# EAGLE board arm (EAGLE 6.5.0)
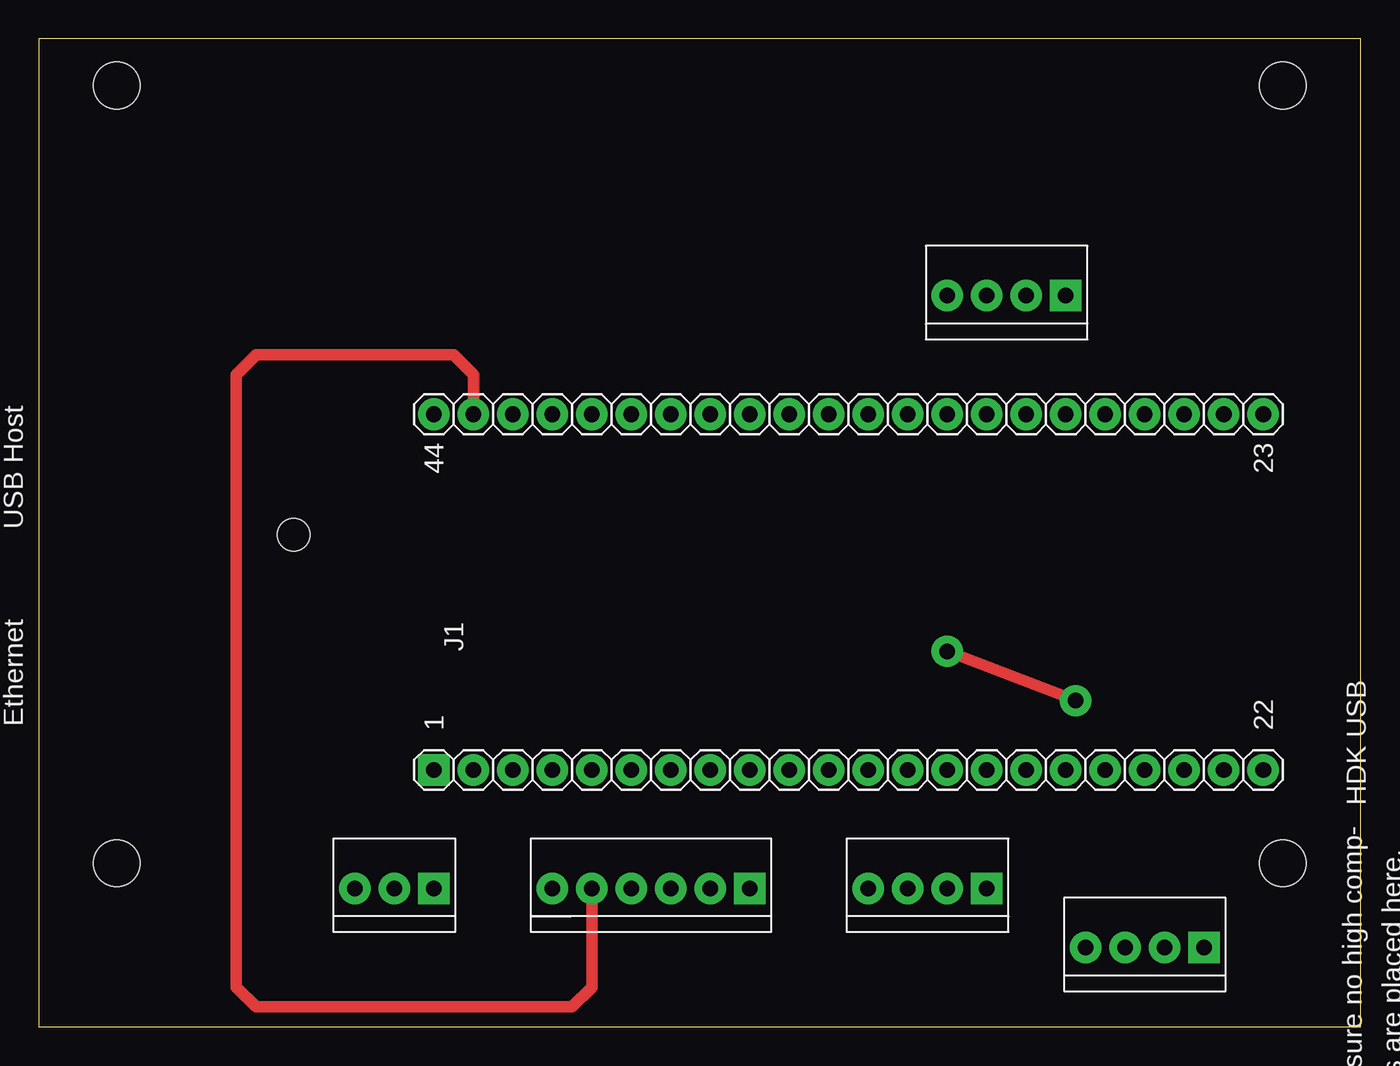
[diagram p0: board, top side]
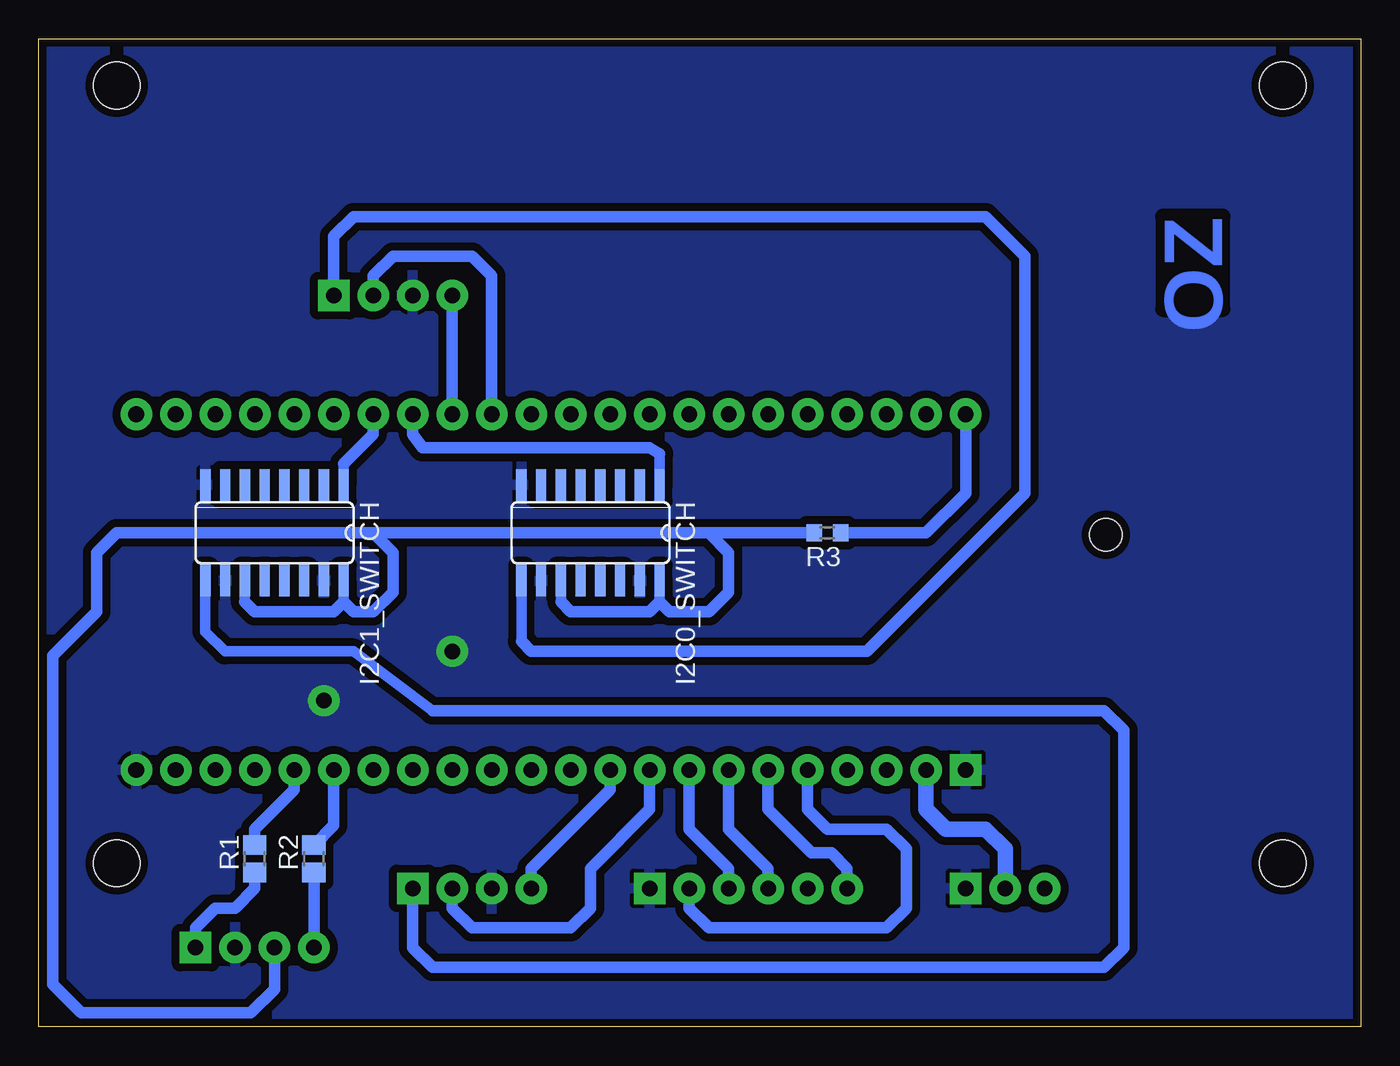
[diagram p1: board, bottom side, seen from below]

Size 85 x 63.5 mm. Coordinates in mm from the lower left corner, seen from the top.
Outline: 0,0 85,0 85,63.5 0,63.5 0,0
Copper layers (1*16): Top 0.035mm / dielectric 1.5mm / Bottom 0.035mm
Design rules "big": minimum track width 25mil, minimum drill 24mil, track to track 20mil, track to pad 20mil, pad to pad 20mil, via to via 20mil, smd to smd 8mil, copper to edge 1mil, drill to drill 40mil, minimum pad ring 10mil, minimum via ring 20mil, stop-mask expansion 4mil, vias tented up to drill 0mil, thermal gap 10mil
Holes 3 mm at 80,10.5 5,10.5 5,60.5 80,60.5

## Footprints (pad centres in the part's own frame; a part is rotated, then mirrored left to right if it is on the bottom)
A2542WV-04P = drill 1 pad 2.027 square: 1 -3.81,0 | drill 1 pad 2.027: 2 -1.27,0; 3 1.27,0; 4 3.81,0
SO16 = smd 0.66 x 2.032: 1 -4.445,-3.073; 2 -3.175,-3.073; 3 -1.905,-3.073; 4 -0.635,-3.073; 5 0.635,-3.073; 6 1.905,-3.073; 7 3.175,-3.073; 8 4.445,-3.073; 9 4.445,3.073; 10 3.175,3.073; 11 1.905,3.073; 12 0.635,3.073; 13 -0.635,3.073; 14 -1.905,3.073; 15 -3.175,3.073; 16 -4.445,3.073
LPC4088_QUICKSTART_BOARD_REV-A = drill 1 pad 2.027 square: 1 -11.43,24.13 | drill 1 pad 2.027: 2 -11.43,21.59; 3 -11.43,19.05; 4 -11.43,16.51; 5 -11.43,13.97; 6 -11.43,11.43; 7 -11.43,8.89; 8 -11.43,6.35; 9 -11.43,3.81; 10 -11.43,1.27; 11 -11.43,-1.27; 12 -11.43,-3.81; 13 -11.43,-6.35; 14 -11.43,-8.89; 15 -11.43,-11.43; 16 -11.43,-13.97; 17 -11.43,-16.51; 18 -11.43,-19.05; 19 -11.43,-21.59; 20 -11.43,-24.13; 21 -11.43,-26.67; 22 -11.43,-29.21; 23 11.43,-29.21; 24 11.43,-26.67; 25 11.43,-24.13; 26 11.43,-21.59; 27 11.43,-19.05; 28 11.43,-16.51; 29 11.43,-13.97; 30 11.43,-11.43; 31 11.43,-8.89; 32 11.43,-6.35; 33 11.43,-3.81; 34 11.43,-1.27; 35 11.43,1.27; 36 11.43,3.81; 37 11.43,6.35; 38 11.43,8.89; 39 11.43,11.43; 40 11.43,13.97; 41 11.43,16.51; 42 11.43,19.05; 43 11.43,21.59; 44 11.43,24.13 | hole 2.1: 3.683,33.147
A2542WV-03P = drill 1 pad 2.027 square: 1 -2.54,0 | drill 1 pad 2.027: 2 0,0; 3 2.54,0
R0805 = smd 1.24 x 1.5: 1 -0.88,0; 2 0.88,0
R0603 = smd 1 x 1.1: 1 -0.85,0; 2 0.85,0
A2542WV-06P = drill 1 pad 2.027 square: 1 -6.35,0 | drill 1 pad 2.027: 2 -3.81,0; 3 -1.27,0; 4 1.27,0; 5 3.81,0; 6 6.35,0

## Placement (x,y rotation side)
I2C0  A2542WV-04P  [A2542WV-04P]  62.23,46.99 180 top
I2C0_SWITCH  MAX4674ESE+  [SO16]  49.53,31.75 180 bottom
I2C1  A2542WV-04P  [A2542WV-04P]  57.15,8.89 180 top
I2C1_SWITCH  MAX4674ESE+  [SO16]  69.85,31.75 180 bottom
J1  LPC4088_QUICKSTART_BOARD_REV-A  [LPC4088_QUICKSTART_BOARD_REV-A]  49.53,27.94 90 top
POWER  A2542WV-03P  [A2542WV-03P]  22.86,8.89 180 top
R1  1k  [R0805]  71.12,10.79 90 bottom
R2  1k  [R0805]  67.31,10.79 90 bottom
R3  1  [R0603]  34.29,31.75 180 bottom
SSP0  A2542WV-06P  [A2542WV-06P]  39.37,8.89 180 top
UART3  A2542WV-04P  [A2542WV-04P]  71.12,5.08 180 top

## Library data of the parts
I2C0 I2C0_SWITCH I2C1 I2C1_SWITCH J1 POWER R1 R2 SSP0 UART3 = MyLib
R3 = resistor

## Nets
+3V3: I2C0_SWITCH.11 I2C0_SWITCH.16 I2C1_SWITCH.11 I2C1_SWITCH.16 R3.2 UART3.3
+5V: J1.43 SSP0.5
GND: I2C0.3 I2C0_SWITCH.8 I2C0_SWITCH.10 I2C0_SWITCH.15 I2C1.3 I2C1_SWITCH.8 I2C1_SWITCH.10 I2C1_SWITCH.15 J1.1 J1.22 POWER.1 SSP0.1 UART3.2
N$1: I2C0.1 I2C0_SWITCH.9
N$2: J1.5 SSP0.2
N$3: J1.8 SSP0.3
N$4: I2C1.2 J1.9
N$5: I2C0.2 J1.32
N$6: I2C0.4 J1.31
N$7: I2C1.4 J1.10
N$8: J1.7 SSP0.4
N$9: J1.18 R1.2
N$10: J1.17 R2.2
N$11: R1.1 UART3.1
N$12: R2.1 UART3.4
N$13: J1.2 POWER.2
N$14: I2C1.1 I2C1_SWITCH.9
N$15: J1.6 SSP0.6
N$16: I2C1_SWITCH.1 J1.29
N$17: I2C0_SWITCH.1 J1.30
N$18: J1.44 R3.1

## Tracks (layer width: path | path; a pad name or v marks a point on that pad's centre or on a via)
+3V3
  Bottom 0.66: I2C1_SWITCH.16 65.41,27.3 | I2C1_SWITCH.11 71.75,27.3 | I2C0_SWITCH.11 51.44,27.3 | I2C0_SWITCH.16 45.09,27.3
  Bottom 0.75: 41.91,31.75 63.5,31.75 | 63.5,31.75 80.01,31.75 81.28,30.48 81.28,26.67 84.11,23.84 84.11,2.73 82.27,0.89 71.37,0.89 69.85,2.41 UART3.3 | 63.5,31.75 62.23,30.48 62.23,27.94 63.5,26.67 64.77,26.67 65.41,27.3 66.04,26.67 71.12,26.67 71.75,27.3 | 51.44,27.3 50.8,26.67 45.72,26.67 45.09,27.3 44.45,26.67 41.91,26.67 40.64,27.94 40.64,30.48 41.91,31.75 | 41.91,31.75 R3.2
+5V
  Top 0.75: J1.43 27.94,41.91 26.67,43.18 13.97,43.18 12.7,41.91 12.7,2.54 13.97,1.27 34.29,1.27 35.56,2.54 SSP0.5
GND  (via drill 1)
  Top 0.75: v58.42,24.13 66.66,20.98
  other vias: 66.67,20.95
  pour Bottom (isolate 0.5): -1.27,65 -1.27,-1.27 87.63,-1.27 87.63,65
N$1
  Bottom 0.66: 53.98,24.77 I2C0_SWITCH.9
  Bottom 0.75: I2C0.1 66.04,50.8 64.77,52.07 24.13,52.07 21.59,49.53 21.59,34.29 31.75,24.13 53.34,24.13 53.98,24.77
N$2
  Bottom 0.75: SSP0.2 43.18,7.62 41.91,6.35 30.48,6.35 29.21,7.62 29.21,11.43 30.48,12.7 34.29,12.7 35.56,13.97 J1.5
N$3
  Bottom 0.75: SSP0.3 40.64,10.16 43.18,12.7 J1.8
N$4
  Bottom 0.75: J1.9 45.72,13.97 49.53,10.16 49.53,7.62 50.8,6.35 57.15,6.35 58.42,7.62 I2C1.2
N$5
  Bottom 0.75: J1.32 55.88,48.26 57.15,49.53 62.23,49.53 63.5,48.26 I2C0.2
N$6
  Bottom 0.75: I2C0.4 J1.31
N$7
  Bottom 0.75: I2C1.4 53.34,10.16 48.26,15.24 J1.10
N$8
  Bottom 0.75: SSP0.4 38.1,10.16 40.64,12.7 J1.7
N$9
  Bottom 0.75: R1.2 71.12,12.7 68.58,15.24 J1.18
N$10
  Bottom 0.75: J1.17 66.04,12.95 R2.2
N$11
  Bottom 0.75: R1.1 71.12,8.89 72.39,7.62 73.66,7.62 74.93,6.35 UART3.1
N$12
  Bottom 0.75: R2.1 UART3.4
N$13
  Bottom 1: POWER.2 22.86,11.43 24.13,12.7 26.67,12.7 27.94,13.97 J1.2
N$14
  Bottom 0.66: I2C1_SWITCH.9 74.3,25.4 73.03,24.13 64.77,24.13 59.69,20.32
  Bottom 0.75: I2C1.1 60.96,5.08 59.69,3.81 16.51,3.81 15.24,5.08 15.24,19.05 16.51,20.32 59.69,20.32
N$15
  Bottom 0.75: SSP0.6 33.02,10.16 34.04,11.18 35.31,11.18 38.1,13.97 J1.6
N$16
  Bottom 0.66: 65.41,36.2 I2C1_SWITCH.1
  Bottom 0.75: J1.29 63.5,38.1 65.41,36.2
N$17
  Bottom 0.66: 45.09,36.83 I2C0_SWITCH.1
  Bottom 0.75: J1.30 60.96,38.1 60.33,37.21 45.72,37.21 45.09,36.83
N$18
  Bottom 0.75: J1.44 25.4,34.29 27.94,31.75 R3.1
(copper drawn outside any net)
  shapes: Bottom circle x5

## Text on the board
Bottom: OZ